# Altium PCB elka2_tubes.PcbDoc
Units mil, origin at the board's own origin, x right, y up, seen from the top; angles counter-clockwise.
Board outline 2045 x 820 mil, 2 copper layers (Top Layer, Bottom Layer), stack 57.918 mil thick; 15 components, 9 nets, 37 pads, 1 vias.
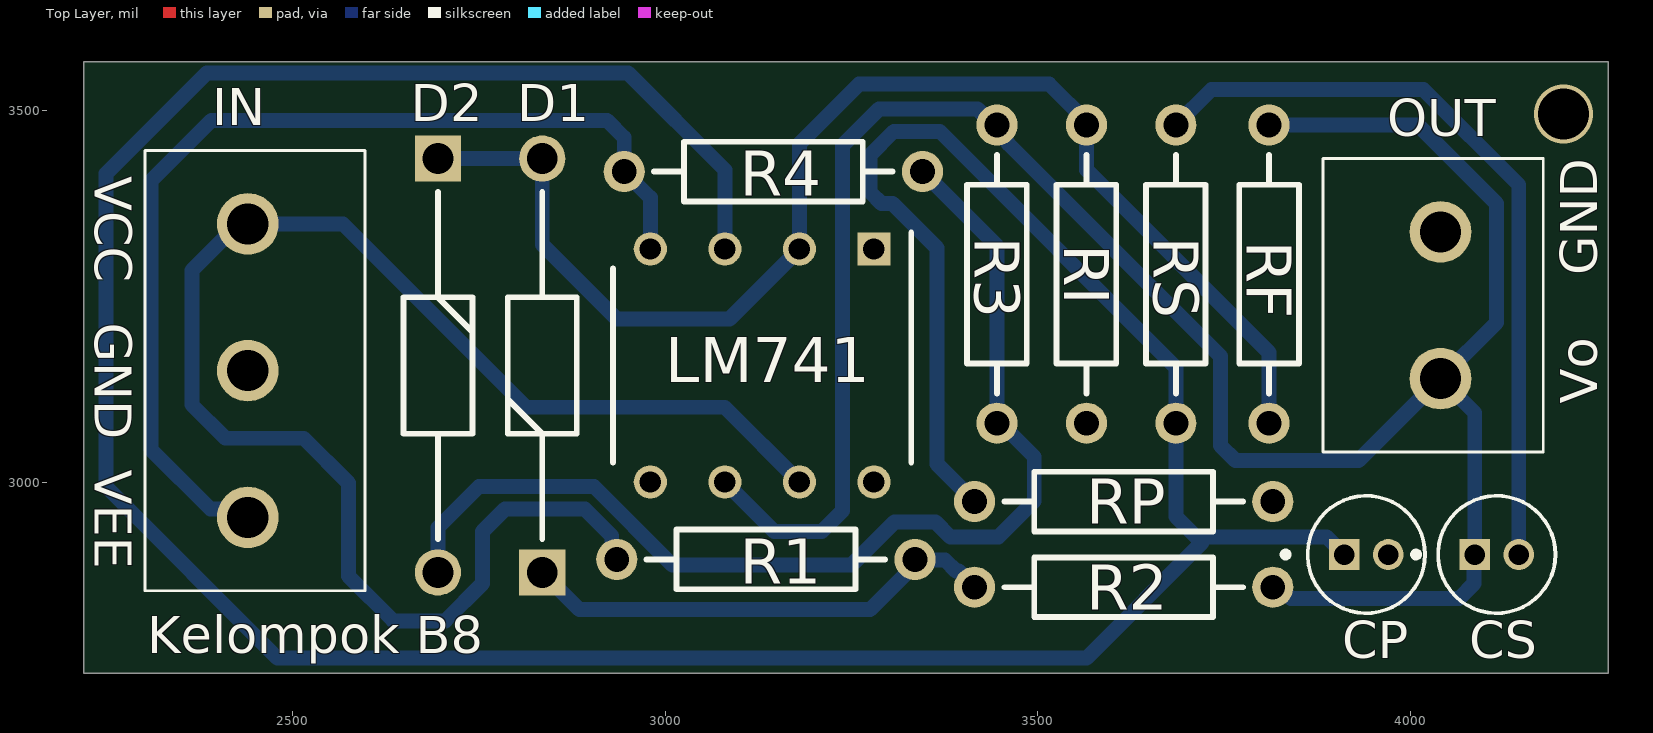
[diagram p0: Top Layer view]
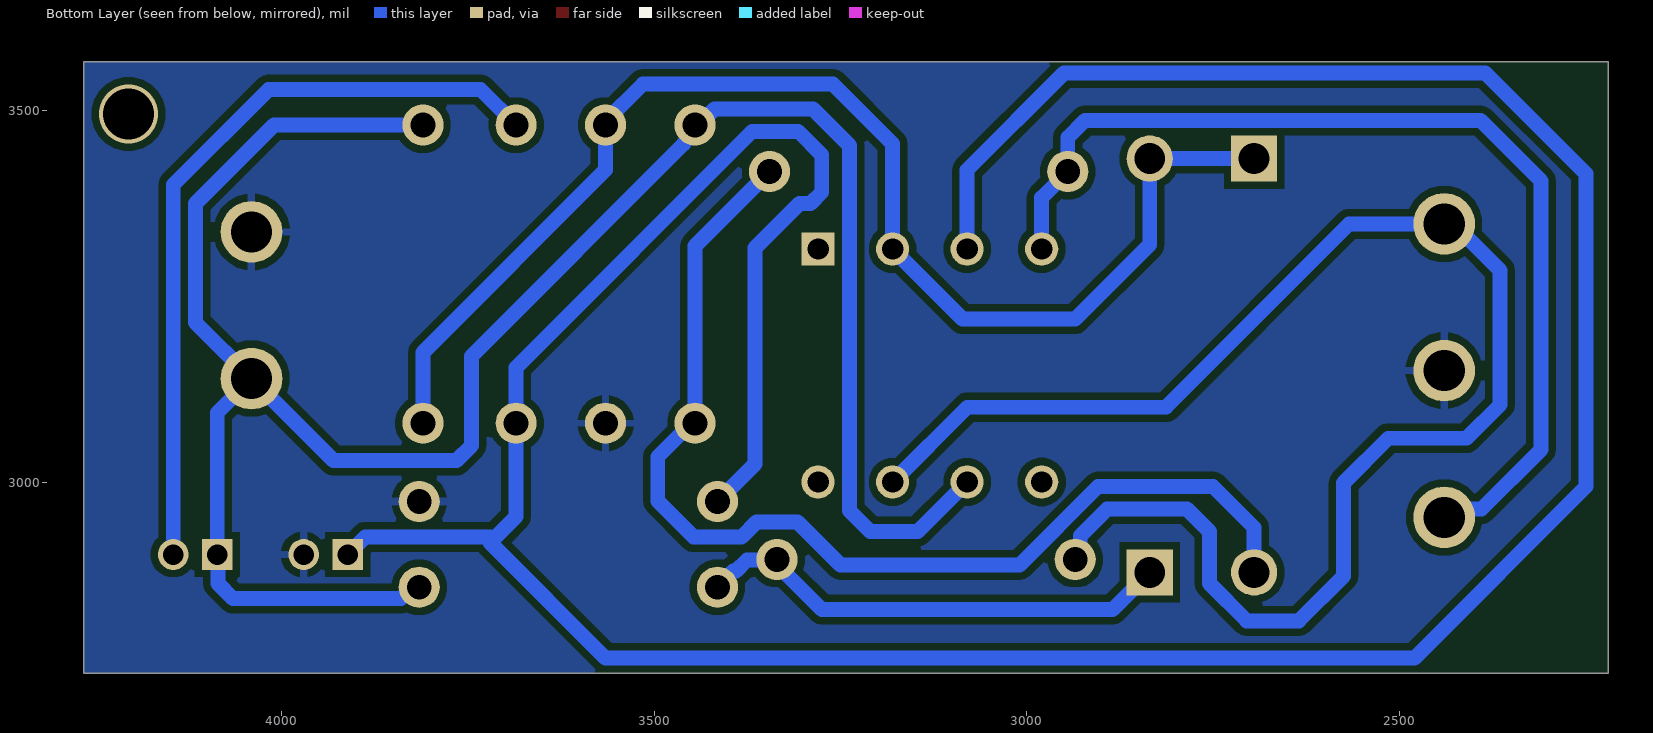
[diagram p1: Bottom Layer view, seen from below]
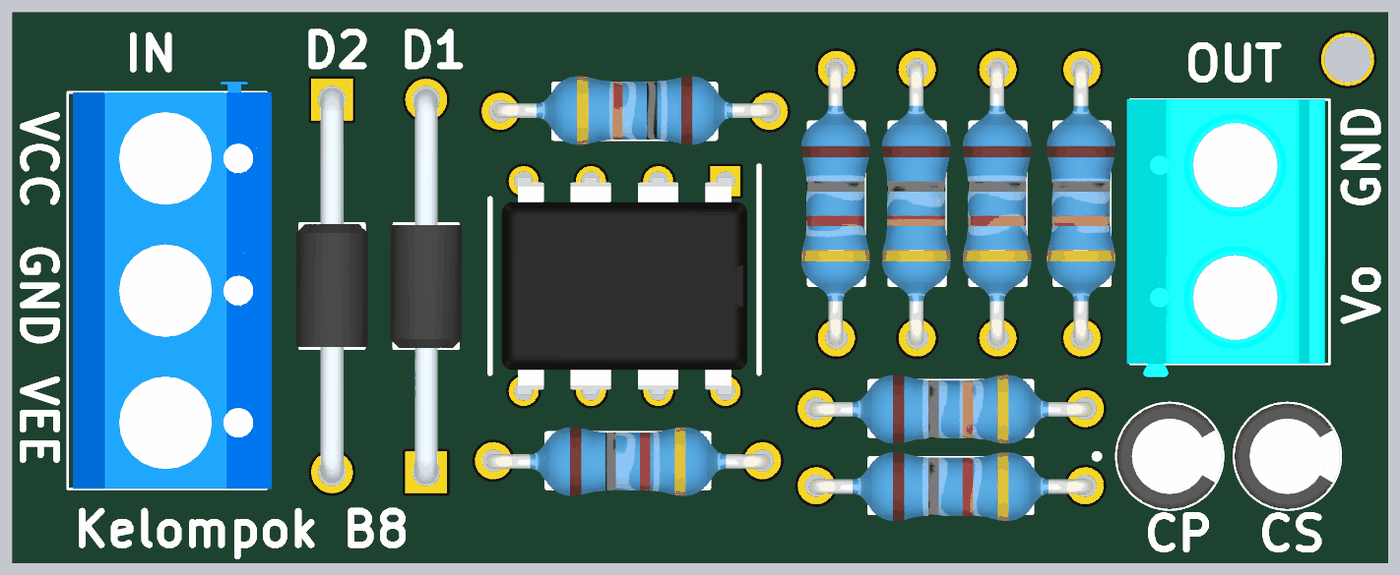
[diagram p2: 3D render of the assembled board from above, using the file's embedded part models]

## Layer stack, top to bottom
Top Solder: solder mask 0.4, Solder Resist, Dk 3.5
Top Layer: signal copper 1.4
Dielectric 1: dielectric 55.1181, FR-4, Dk 4.8
Bottom Layer: signal copper 1.4
Bottom Solder: solder mask 0.4, Solder Resist, Dk 3.5

## Board outline
2220,2745 4265,2745 4265,3565 2220,3565

## Design rules (kind name [scope] priority, off if disabled: settings)
Clearance [All] p1: gap=10 ignorepadtopadclearanceinfootprint=FALSE except(0: Arc-Hole Track-Hole SMDPad-Hole THPad-Hole Via-Hole Fill-Hole Poly-Hole Region-Hole Text-Hole)
PolygonConnect [All] p1: connectstyle=Relief reliefconductorwidth=10 reliefentries=4 polygonreliefangle="90 Angle" airgapwidth=10
RoutingVias [All] p1: holewidth=28 width=50 viastyle="Through Hole" minholewidth=28 minwidth=50 maxholewidth=28 maxwidth=50
SolderMaskExpansion [All] p1: expansion=4 istentingtop=FALSE
Width [All] p1: maxlimit=30 minlimit=10 preferedwidth=20 toplayer_maxwidth=10 toplayer_prefwidth=10 bottomlayer_minwidth=20 minimp=50.000000 maximp=50.000000 favimp=50.000000
30 further rules are at their usual default settings.

## Components (designator, comment, footprint, x,y, rotation, side; value= is the part's Value field where it differs from the comment)
CP "elco_kecil" elco_kecil 3940.47,2904 r0 top
CS "elco_kecil" elco_kecil 4115.47,2904 r0 top
D1 "1N4007-E3_73" DIOAD1405W86L465D235 2835,2880 r90 top
D2 "1N4007-E3_73" DIOAD1405W86L465D235 2695,3435.12 r270 top
IN "KF301-3P" KF3013P 2440,3347.52 r270 top
LM741 "LM741CN_NOPB-936607701" DIP794W53P254L959H508Q8N 3130,3157.56 r270 top
OUT "KF301-2P" KF3012P 4040,3140 r90 top
R1 "Resistor 0.25W" "Resistor 0.25W" 3135,2897.36 r180 top
R2 "Resistor 0.25W" "Resistor 0.25W" 3615,2860.12 r180 top
R3 "Resistor 0.25W" "Resistor 0.25W" 3445,3280.12 r90 top
R4 "Resistor 0.25W" "Resistor 0.25W" 3145,3417.76 r0 top
RF "Resistor 0.25W" "Resistor 0.25W" 3810,3280.12 r90 top
RI "Resistor 0.25W" "Resistor 0.25W" 3565,3280.12 r90 top
RP "Resistor 0.25W" "Resistor 0.25W" 3615,2975.12 r180 top
RS "Resistor 0.25W" "Resistor 0.25W" 3685,3280.12 r90 top

## Footprints (in the part's own frame and the unit in brackets; to place one, negate y for a bottom-side part, rotate by r counter-clockwise, add the part's x,y. Pads: shape width x height; smd on the part's side, far side on the other; paste and mask are expansions set on the pad)
DIOAD1405W86L465D235 [mm]
  rect 1.575x1.575 hole 1.05: 1(0,0)
  round 1.575 hole 1.05: 2(14.1,0)
  silkscreen extent 1.14,-1.18 12.96,1.18, body extent -0.43,-1.35 14.48,1.35, height 2.69
DIP794W53P254L959H508Q8N [mm]
  rect 1.13x1.13 hole 0.73: 1(-3.97,3.81)
  round 1.13 hole 0.73: 2(-3.97,1.27) 3(-3.97,-1.27) 4(-3.97,-3.81) 5(3.97,-3.81) 6(3.97,-1.27) 7(3.97,1.27) 8(3.97,3.81)
  silkscreen extent -4.53,-5.08 3.3,5.08, body extent -4.1,-4.64 4.1,4.64, height 4.21
elco_kecil [mm]
  round 1.05 hole 0.7: N(0.75,0)
  rect 1.05x1.05 hole 0.7: P(-0.75,0)
  silkscreen extent -2.85,-2 2,2, body extent -2,-2 2,2, height 7
KF3012P [mm]
  round 2.1 hole 1.4: 1(0,0) 2(5,0)
  silkscreen extent -2.5,-3.5 7.5,4, body extent -2.99,-3.35 7.51,4.15, height 10
KF3013P [mm]
  round 2.1 hole 1.4: 1(0,0) 2(5,0) 3(10,0)
  silkscreen extent -2.5,-3.5 12.5,4, body extent -2.9,-3.31 12.5,4.19, height 10.04
"Resistor 0.25W" [mm]
  round 1.4 hole 0.85: 1(-5.08,0) 2(5.08,0)
  silkscreen extent -4.06,-1.02 4.06,1.02, body extent -5.35,-1.27 5.35,1.33, height 2.7

## Part data
CP CS: "CAP ALUM 10UF 20% 25V RADIAL", Package="RADIAL-2 Panasonic", Availability="In Stock", Check_prices=https://www.snapeda.com/parts/EEA-GA1E100/Panasonic/view-part/2301584/?ref=eda, MF=Panasonic, MP=EEA-GA1E100, Price=None, SnapEDA_Link=https://www.snapeda.com/parts/EEA-GA1E100/Panasonic/view-part/2301584/?ref=snap
D1 D2: "Diode", Arrow Part Number=1N4007-E3/73, Manufacturer_Name=Vishay, Mouser Part Number=625-1N4007-E3/73, Arrow Price/Stock=https://www.arrow.com/en/products/1n4007-e373/vishay?region=europe, Datasheet Link=https://mouser.componentsearchengine.com/Datasheets/2/1N4007-E3_73.pdf, Manufacturer_Part_Number=1N4007-E3/73, Mouser Price/Stock=https://www.mouser.co.uk/ProductDetail/Vishay-General-Semiconductor/1N4007-E3-73?qs=N4vtoAxH%2FSqT3Ng3e4K0Gw%3D%3D
IN OUT: "Connector", Manufacturer_Name="Handson Technology", Datasheet Link=http://www.handsontec.com/dataspecs/terminal%20block-5mm.pdf, Height=10mm
  IN: Manufacturer_Part_Number=KF301-3P
  OUT: Manufacturer_Part_Number=KF301-2P
LM741: "Integrated Circuit", Arrow Part Number=LM741CN/NOPB-936607701, Manufacturer_Name="Texas Instruments", Arrow Price/Stock=https://www.arrow.com/en/products/lm741cnnopb-936607701/texas-instruments, Datasheet Link=https://www.arrow.com/en/products/lm741cnnopb-936607701/texas-instruments, Height=5.08mm, Manufacturer_Part_Number=LM741CN/NOPB-936607701

## Via types
v1: diameter 78.74, hole 68.9, Top Layer to Bottom Layer, 1 vias

## Nets (pads, with @x,y where several pads share a name; then routed paths per layer and width w, separated by ;. In a path a pad name is that pad's centre, name@x,y a point inside that pad or via, vN(x,y) a via of type N, cw(c..) or ccw(c..) an arc to the next point about the centre after c; other vN are vias at no path point)
FB: D1.2 D2.1 LM741.2 RF.1 RI.2 | length 1766.8
  Bottom Layer w20: D2.1 D1.2 2835,3320 2935,3220 3086.14,3220 LM741.2 3180,3455 3260,3535 3515.12,3535 3565,3485.12 3565,3420 3810,3175 RF.1
GND: CP.N IN.2 OUT.2 RI.1 RP.1
NetCS_N: CS.N RS.2 | length 1028.6
  Bottom Layer w20: RS.2 3732.56,3527.68 4017.32,3527.68 4145,3400 CS.N
NetD1_1: D1.1 R1.1 R2.2 | length 644.3
  Bottom Layer w20: D1.1 2885,2830 3274.68,2830 3342.03,2897.36 3342.96,2896.43 3375.47,2896.43 3390.07,2881.84 3393.78,2881.84 3415,2860.62 R2.2
NetD2_2: D2.2 R3.1 R4.2 | length 1485.5
  Bottom Layer w20: D2.2 2695,2940 2750,2995 2904.62,2995 3009.62,2890 3250,2890 3307.56,2947.56 3362.44,2947.56 3382.44,2927.56 3446.84,2927.56 3495,2975.72 3495,3035.12 3450,3080.12 R3.1 3445,3317.76 R4.2
noninv: CP.P LM741.3 RP.2 RS.1 | length 4631.6
  Bottom Layer w20: LM741.3 3080,3420 2950,3550 2385,3550 2250,3415 2250,2995 2480,2765 3565,2765 3720,2920 3710,2930 3685,2955 RS.1 3685,3155 3368.28,3471.73 3306.73,3471.73 3275,3440 3275,3390 3290,3375 3305,3375 3364.7,3315.3 3364.7,3025.42 RP.2 ; 3720,2927.56 3887.38,2927.56 CP.P
OUT: CS.P LM741.6 OUT.1 R2.1 R3.2 RF.2 | length 3020
  Bottom Layer w20: LM741.6 3146.26,2935 3210,2935 3237.76,2962.76 3237.76,3452.76 3286.73,3501.73 3418.89,3501.73 3440.5,3480.12 R3.2 3445,3470.62 3460.64,3454.97 3460.64,3454.36 3745,3170 3745,3050 3765,3030 3930,3030 OUT.1 ; RF.2 4009.88,3480.12 4115,3375 4115,3215 OUT.1 ; R2.1 3824.5,2860.12 3839.62,2845 4065,2845 4085.04,2865.04 4085.04,2903.09 CS.P 4085.94,3094.06 OUT.1
VCC: IN.1 LM741.7 R1.2 | length 2073.4
  Bottom Layer w20: R1.2 2928.28,2904.08 2928.28,2928.91 2892.19,2965 2785,2965 2755,2935 2755,2865 2705,2815 2635,2815 2575,2875 2575,3000 2515,3060 2410,3060 2365,3105 2365,3285 2427.52,3347.52 2567.48,3347.52 2813.5,3101.5 3079.76,3101.5 LM741.7
VEE: IN.3 LM741.4 R4.1 | length 1369.8
  Bottom Layer w20: IN.3 2428.97,2964.85 2390.15,2964.85 2310,3045 2310,3405 2391.12,3486.12 2922.16,3486.12 2945,3463.28 R4.1 2980,3382.76 LM741.4
pads on no net: LM741.1 LM741.5 LM741.8
copper on no net:
  other v1: 4205,3495

## Polygon pours and split planes (outlines as drawn)
GND on Bottom Layer "NONET_L-01_P-001" (solid, remove dead copper, pour order 0): 2220,3565 4265,3565 4265,2745 2220,2745

## Silkscreen, mask and mechanical layers (free items; w line width, h text height)
Top Overlay:
  text "VCC" at 2235,3411.64 h50 r270
  text "GND" at 4250,3278.33 h50 r90
  text "GND" at 2235,3214.8 h50 r270
  text "Vo" at 4250,3106.47 h50 r90
  text "VEE" at 2235,3017.94 h50 r270
  text "Kelompok B8" at 2305,2771.66 h50